# Altium PCB BOARD2.PcbDoc
Units mm, origin at the board's own origin, x right, y up, seen from the top; angles counter-clockwise.
Board outline 50 x 50 mm, 2 copper layers (Top Layer, Bottom Layer); 45 components, 74 nets, 187 pads, 38 vias.
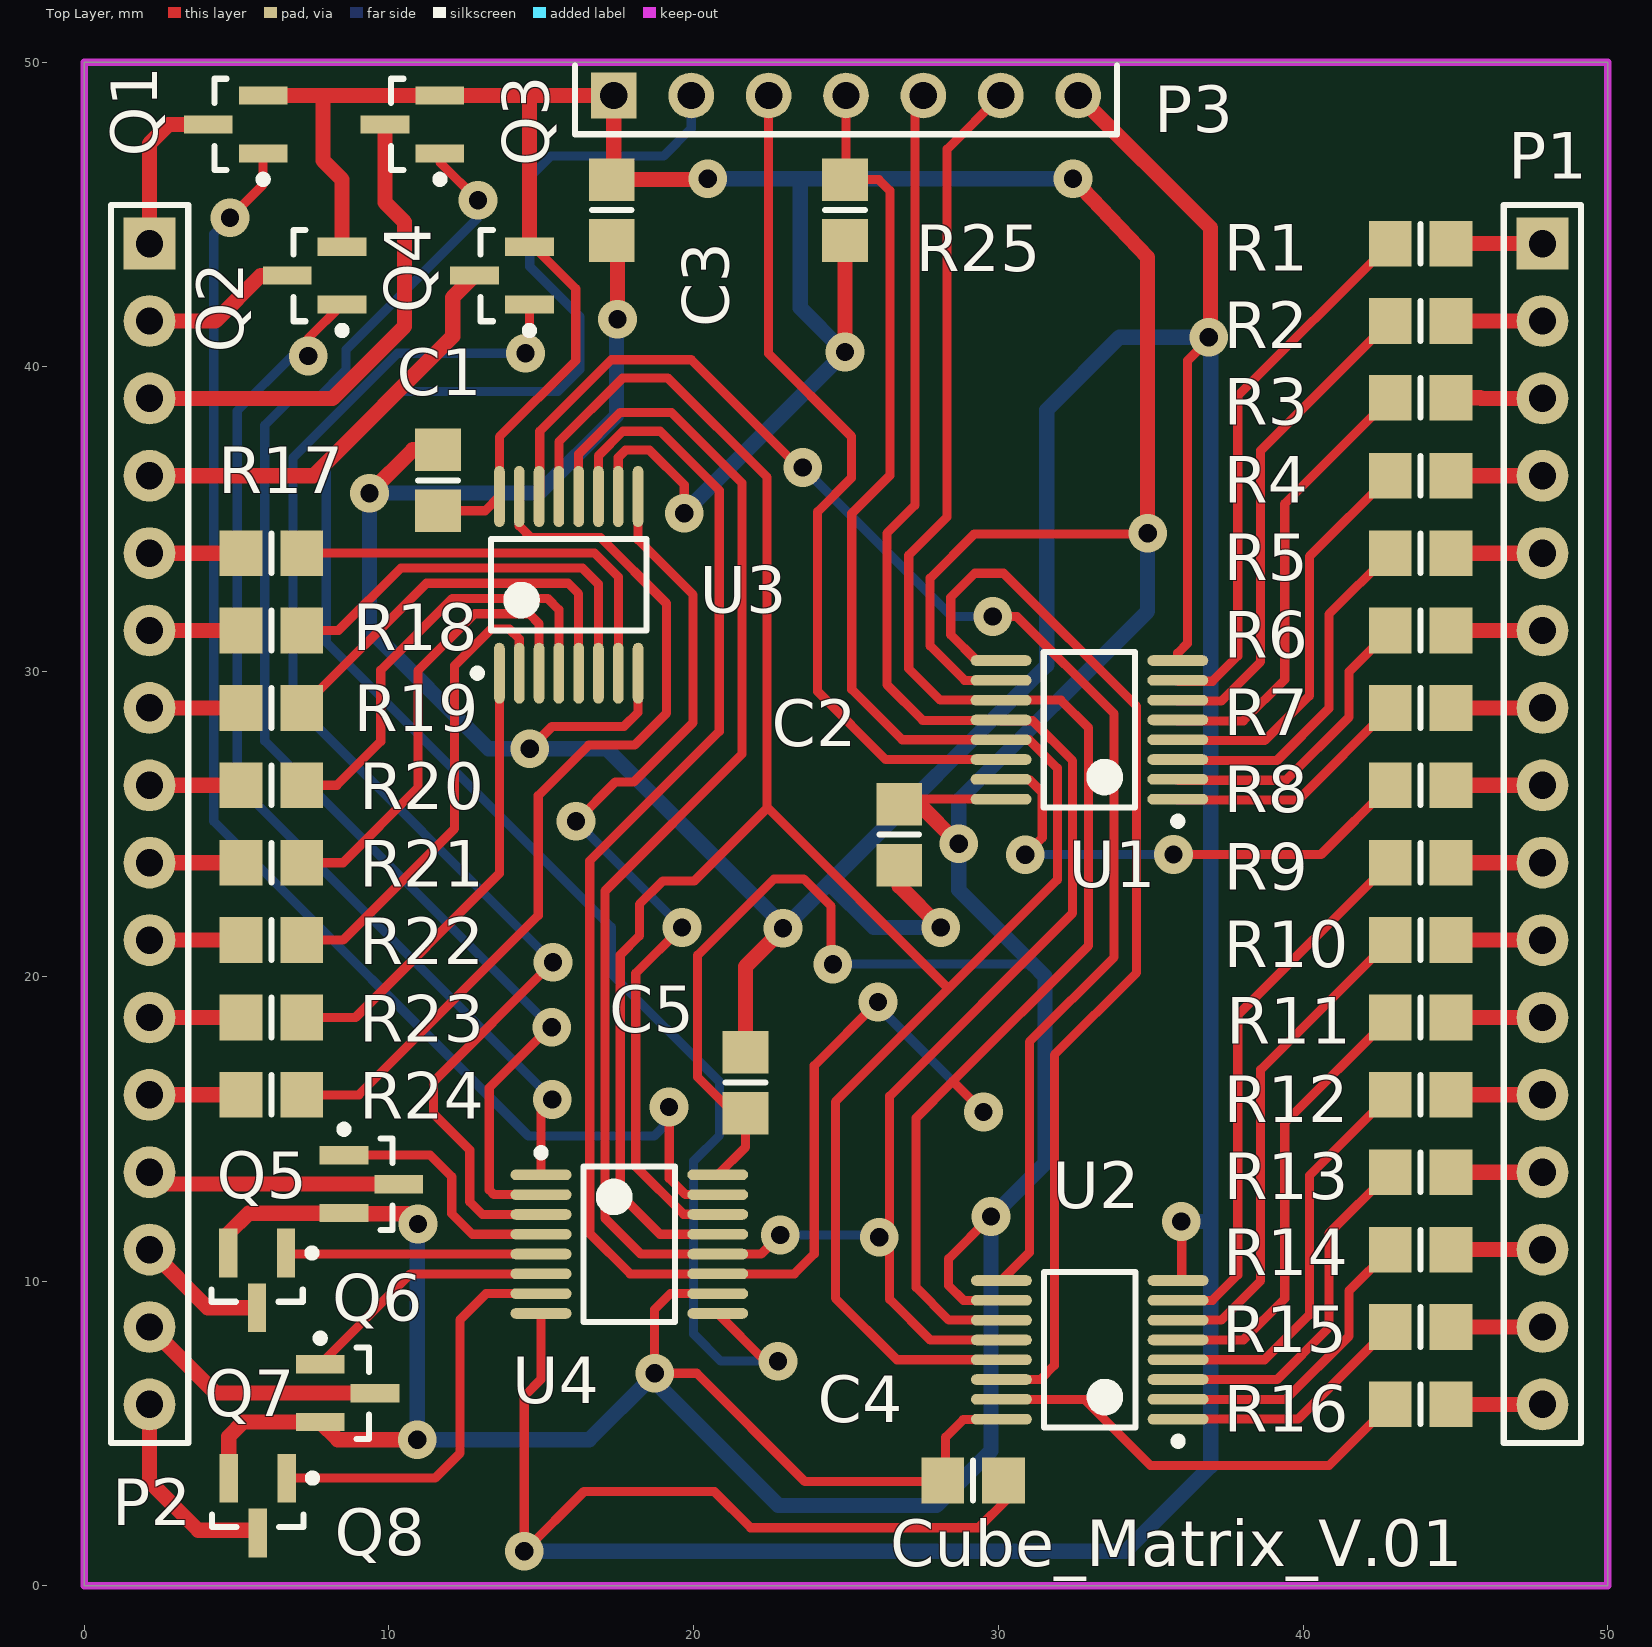
[diagram p0: Top Layer view]
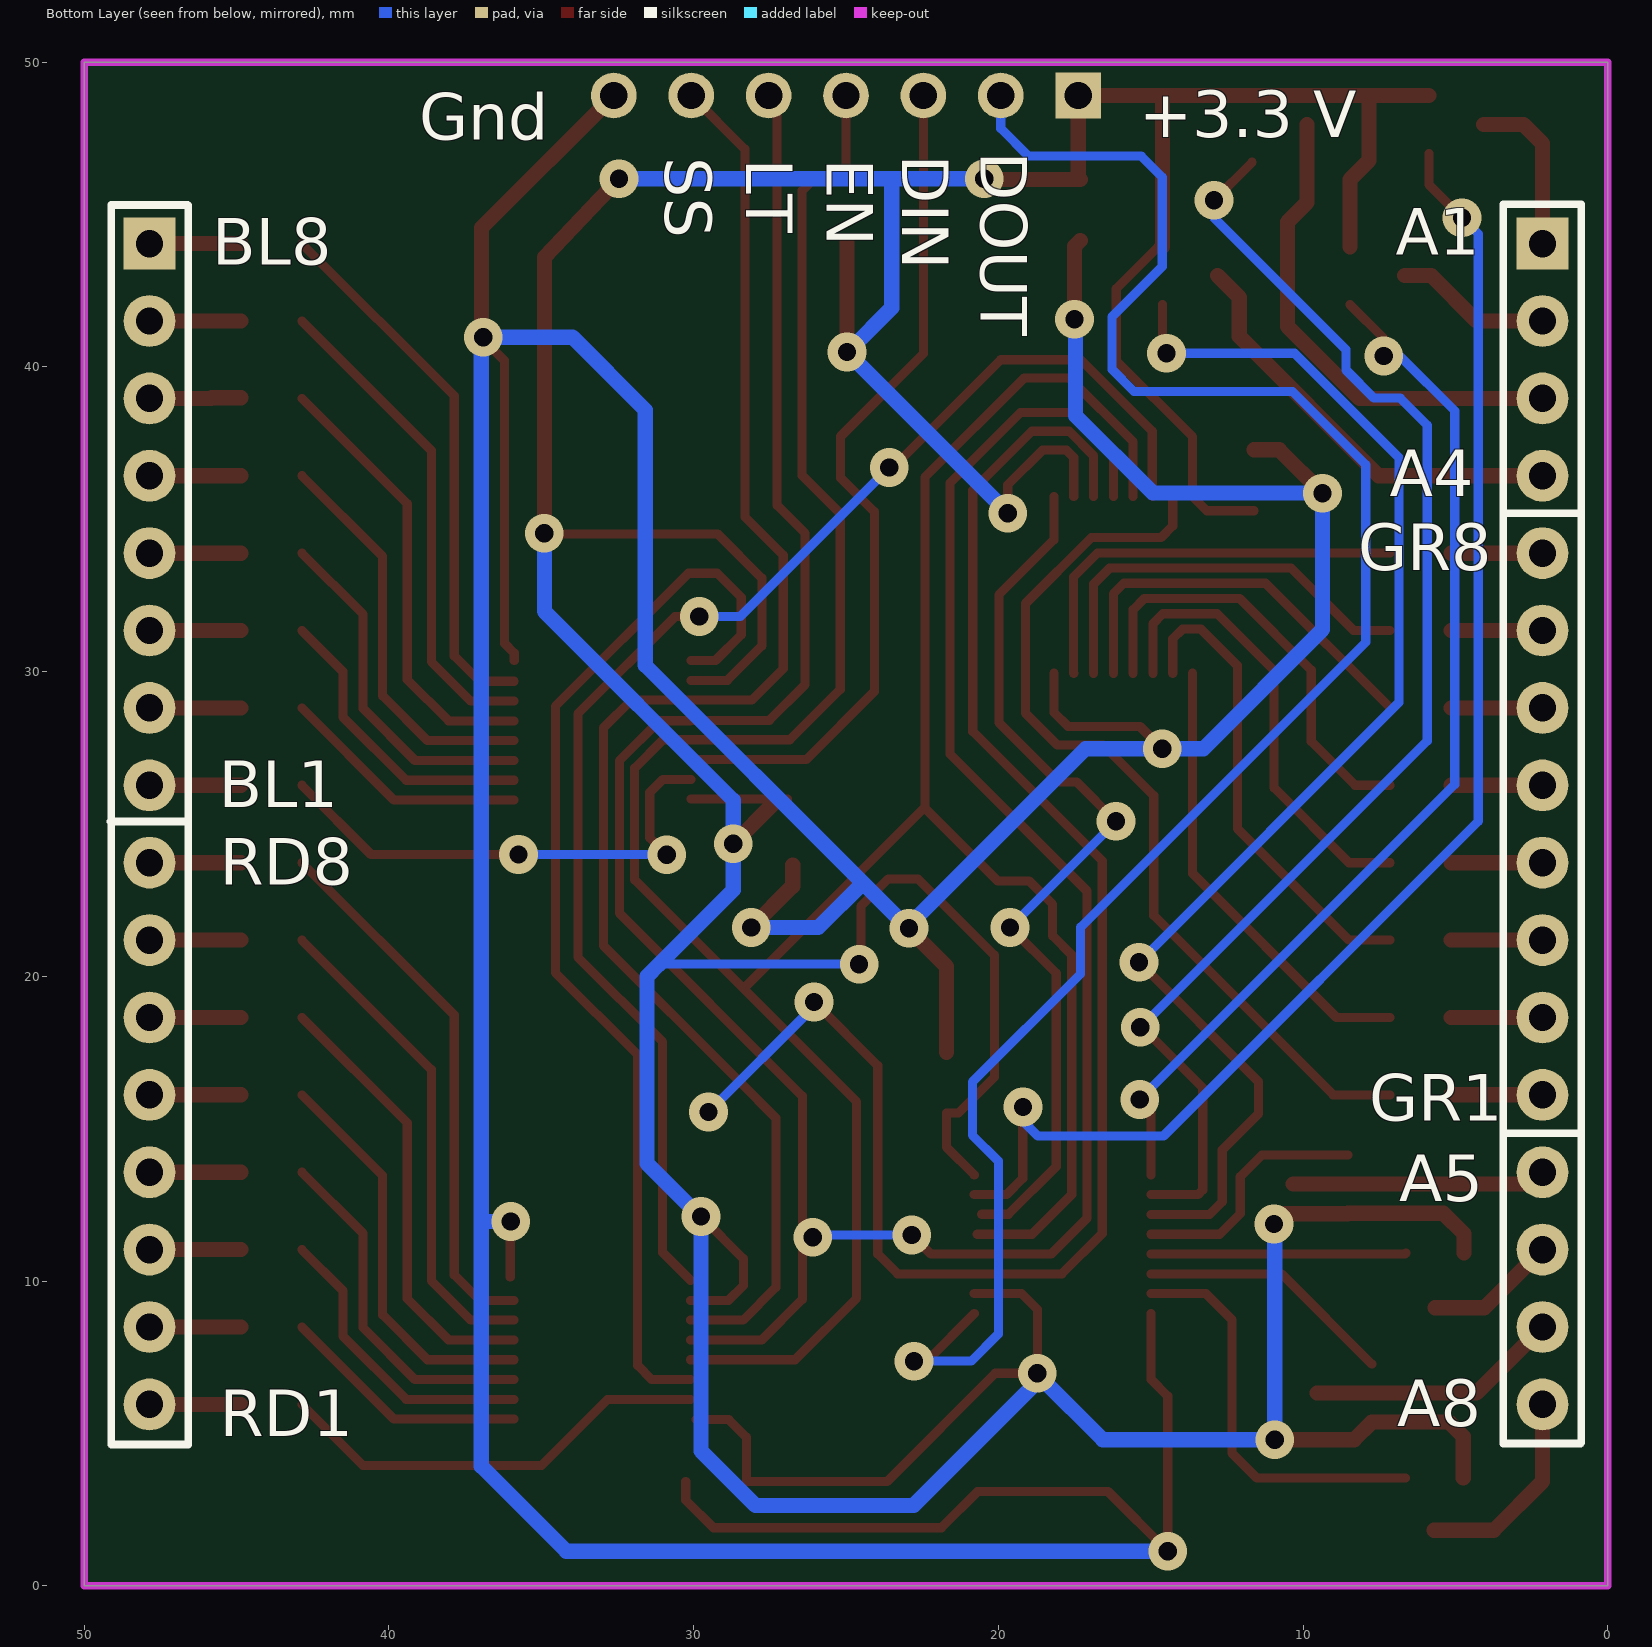
[diagram p1: Bottom Layer view, seen from below]

## Layer stack, top to bottom
Top Solder: solder mask 0.0102, Solder Resist, Dk 3.5
Top Layer: signal copper 0.0356
Dielectric 1: dielectric 0.32, FR-4, Dk 4.8
Bottom Layer: signal copper 0.0356
Bottom Solder: solder mask 0.0102, Solder Resist, Dk 3.5

## Board outline
0,0 50,0 50,50 0,50

## Design rules (kind name [scope] priority, off if disabled: settings)
Clearance [All] p1: gap=0.2
HoleSize [All] p1 off: absolutevalues=TRUE maxlimit=2.54 minlimit=0.025 maxpercent=80.000 minpercent=20.000
HoleToHoleClearance [All] p1 off: gap=0.254 allowstackedmicrovias=TRUE
LayerPairs [All] p1 off: enforce=TRUE
MinimumSolderMaskSliver [All] p1 off: minsoldermaskwidth=0.254
NetAntennae [All] p1 off: netantennaetolerance=0
PolygonConnect [All] p1: connectstyle=Relief reliefconductorwidth=0.254 reliefentries=4 polygonreliefangle="90 Angle" airgapwidth=0.254
RoutingVias [All] p1: holewidth=0.6 width=1.27 viastyle="Through Hole" minholewidth=0.6 minwidth=1.27 maxholewidth=0.6 maxwidth=1.27
SilkToBoardRegionClearance [All] p1 off:
SilkToSilkClearance [All] p1 off: silktosilkclearance=0.254
SilkToSolderMaskClearance [IsPad] p1 off: minsilkscreentomaskgap=0.254 clearancetoexposedcopper=TRUE
SolderMaskExpansion [All] p1: expansion=0.102
Width [All] p1: maxlimit=0.5 minlimit=0.3 preferedwidth=0.3
21 further rules are at their usual default settings.

## Components (designator, comment, footprint, x,y, rotation, side; value= is the part's Value field where it differs from the comment)
C1 "Cap" 6-0805_M 11.61,36.28 r270 top locked
C2 "Cap" 6-0805_M 26.75,24.65 r90 top locked
C3 "Cap" 6-0805_M 17.31,45.15 r90 top
C4 "Cap" 6-0805_M 29.17,3.45 r180 top locked
C5 "Cap" 6-0805_M 21.7,16.51 r270 top locked
P1 "Header 16" HDR1X16 47.86,44.05 r270 top locked
P2 "Header 16" HDR1X16 2.14,44.05 r270 top locked
P3 "Header 7" HDR1X7 17.38,48.91 r0 top locked
Q1 "IRLML6402" SOT95P237X112-3N 4.97,47.96 r180 top locked
Q2 "IRLML6402" SOT95P237X112-3N 7.56,43 r180 top locked
Q3 "IRLML6402" SOT95P237X112-3N 10.77,47.96 r180 top locked
Q4 "IRLML6402" SOT95P237X112-3N 13.71,43 r180 top locked
Q5 "IRLML6402" SOT95P237X112-3N 9.42,13.18 r0 top locked
Q6 "IRLML6402" SOT95P237X112-3N 5.67,10.02 r270 top locked
Q7 "IRLML6402" SOT95P237X112-3N 8.64,6.32 r0 top locked
Q8 "IRLML6402" SOT95P237X112-3N 5.69,2.63 r270 top locked
R1 "Res2" 6-0805_M 43.86,44.05 r0 top locked
R2 "Res2" 6-0805_M 43.86,41.51 r0 top locked
R3 "Res2" 6-0805_M 43.86,38.99 r0 top locked
R4 "Res2" 6-0805_M 43.86,36.43 r0 top locked
R5 "Res2" 6-0805_M 43.86,33.89 r0 top locked
R6 "Res2" 6-0805_M 43.86,31.35 r0 top locked
R7 "Res2" 6-0805_M 43.86,28.81 r0 top locked
R8 "Res2" 6-0805_M 43.86,26.27 r0 top locked
R9 "Res2" 6-0805_M 43.86,23.73 r0 top locked
R10 "Res2" 6-0805_M 43.86,21.19 r0 top locked
R11 "Res2" 6-0805_M 43.86,18.65 r0 top locked
R12 "Res2" 6-0805_M 43.86,16.11 r0 top locked
R13 "Res2" 6-0805_M 43.86,13.57 r0 top locked
R14 "Res2" 6-0805_M 43.86,11.03 r0 top locked
R15 "Res2" 6-0805_M 43.86,8.49 r0 top locked
R16 "Res2" 6-0805_M 43.86,5.95 r0 top locked
R17 "Res2" 6-0805_M 6.14,33.89 r180 top locked
R18 "Res2" 6-0805_M 6.14,31.35 r180 top locked
R19 "Res2" 6-0805_M 6.14,28.81 r180 top locked
R20 "Res2" 6-0805_M 6.14,26.27 r180 top locked
R21 "Res2" 6-0805_M 6.14,23.73 r180 top locked
R22 "Res2" 6-0805_M 6.14,21.19 r180 top locked
R23 "Res2" 6-0805_M 6.14,18.65 r180 top locked
R24 "Res2" 6-0805_M 6.14,16.11 r180 top locked
R25 "Res2" 6-0805_M 24.97,45.15 r270 top locked
U1 "74HC595" TSOP65P640X110-16M 32.99,28.09 r180 top locked
U2 "74HC595" TSOP65P640X110-16M 33,7.74 r180 top locked
U3 "74HC595" TSOP65P640X110-16M 15.9,32.85 r90 top locked
U4 "74HC595" TSOP65P640X110-16M 17.89,11.21 r0 top locked

## Footprints (in the part's own frame and the unit in brackets; to place one, negate y for a bottom-side part, rotate by r counter-clockwise, add the part's x,y. Pads: shape width x height; smd on the part's side, far side on the other; paste and mask are expansions set on the pad)
6-0805_M [mm] "Chip Resistor, Body 2.0x1.2mm, IPC Low Density"
  rect 1.4x1.5 smd: 1(-1,0) 2(1,0)
  silkscreen extent 0,-0.65 0,0.65, body extent -1.07,-0.7 1.07,0.7, height 0.7
HDR1X7 [mm] "Connector; Header; 7 Position"
  rect 1.5x1.5 hole 0.9: 1(0,0)
  round 1.5 hole 0.9: 2(2.54,0) 3(5.08,0) 4(7.62,0) 5(10.16,0) 6(12.7,0) 7(15.24,0)
  silkscreen extent -1.27,-1.27 16.51,0.98
HDR1X16 [mm] "Connector; Header; 16 Position"
  rect 1.7x1.7 hole 0.9: 1(0,0)
  round 1.7 hole 0.9: 2(2.54,0) 3(5.08,0) 4(7.62,0) 5(10.16,0) 6(12.7,0) 7(15.24,0) 8(17.78,0) 9(20.32,0) 10(22.86,0) 11(25.4,0) 12(27.94,0) 13(30.48,0) 14(33.02,0) 15(35.56,0) 16(38.1,0)
  silkscreen extent -1.27,-1.27 39.37,1.27
SOT95P237X112-3N [mm] "SOT23, 3-Leads, Body 2.92x2.37mm, Pitch 0.95mm, IPC Medium Density"
  rect 1.6x0.6 smd: 1(-0.9,0.95) 2(0.9,0) 3(-0.9,-0.95)
  silkscreen extent -1.03,-1.5 0.7,1.92, body extent -0.7,-1.52 0.7,1.52, height 1.12
TSOP65P640X110-16M [mm] "TSOP, 16-Leads, Body 5.00x4.40mm, Pitch 0.65mm, IPC Low Density"
  oval 2x0.35 smd: 1(-2.9,2.275) 2(-2.9,1.625) 3(-2.9,0.975) 4(-2.9,0.325) 5(-2.9,-0.325) 6(-2.9,-0.975) 7(-2.9,-1.625) 8(-2.9,-2.275) 9(2.9,-2.275) 10(2.9,-1.625) 11(2.9,-0.975) 12(2.9,-0.325) 13(2.9,0.325) 14(2.9,0.975) 15(2.9,1.625) 16(2.9,2.275)
  silkscreen extent -3.03,-2.55 1.5,3.12, body extent -2.25,-2.55 2.25,2.55, height 1.1

## Part data
C1 C2 C3 C4 C5: "Capacitor"
P1 P2: "Header, 16-Pin"
P3: "Header, 7-Pin"
R1 R2 R3 R4 R5 R6 R7 R8 R9 R10 R11 R12 R13 R14 R15 R16 R17 R18 R19 R20 R21 R22 R23 R24 R25: "Resistor"
U1 U2 U3 U4: "NXP"

## Via types
v1: diameter 1.27, hole 0.6, Top Layer to Bottom Layer, 38 vias

## Nets (pads, with @x,y where several pads share a name; then routed paths per layer and width w, separated by ;. In a path a pad name is that pad's centre, name@x,y a point inside that pad or via, vN(x,y) a via of type N, cw(c..) or ccw(c..) an arc to the next point about the centre after c; other vN are vias at no path point)
A1: P2.1 Q1.2 | length 5.5
  Top Layer w0.5: P2.1 2.14,47.34 2.76,47.96 Q1.2
A2: P2.2 Q2.2 | length 5.1
  Top Layer w0.5: P2.2 4.3,41.51 5.79,43 Q2.2
A3: P2.3 Q3.2 | length 16.2
  Top Layer w0.5: P2.3 8.15,38.97 10.51,41.33 10.51,44.76 9.87,45.4 Q3.2
A4: P2.4 Q4.2 | length 14.1
  Top Layer w0.5: P2.4 7.52,36.43 12.09,41 12.09,42.28 Q4.2
A5: P2.13 Q5.2 | length 8.3
  Top Layer w0.5: P2.13 2.53,13.18 Q5.2
A6: P2.14 Q6.2 | length 4.3
  Top Layer w0.5: P2.14 4.05,9.12 Q6.2
A7: P2.15 Q7.2 | length 8.3
  Top Layer w0.5: P2.15 4.31,6.32 Q7.2
A8: P2.16 Q8.2 | length 6.8
  Top Layer w0.5: P2.16 2.14,3.42 3.74,1.82 Q8.2@5.7,1.82
BL1: P1.8 R8.2 | length 3
  Top Layer w0.5: R8.2 P1.8
BL2: P1.7 R7.2 | length 3
  Top Layer w0.5: R7.2 P1.7
BL3: P1.6 R6.2 | length 3
  Top Layer w0.5: R6.2 P1.6
BL4: P1.5 R5.2 | length 3
  Top Layer w0.5: R5.2 P1.5
BL5: P1.4 R4.2 | length 3
  Top Layer w0.5: R4.2 P1.4
BL6: P1.3 R3.2 | length 3
  Top Layer w0.5: R3.2 45.82,38.99 45.84,38.97 P1.3
BL7: P1.2 R2.2 | length 3
  Top Layer w0.5: R2.2 P1.2
BL8: P1.1 R1.2 | length 3
  Top Layer w0.5: R1.2 P1.1
DIN: P3.3 U1.14 | length 28.1
  Top Layer w0.3: P3.3 22.46,40.44 25.18,37.72 25.18,36.36 24.07,35.25 24.07,29.35 26.305,27.115 U1.14
DOUT: P3.2 U4.9 | length 63.7
  Top Layer w0.3: U4.9 22.355,7.37 v1(22.77,7.37)
  Bottom Layer w0.3: P3.2 19.92,47.83 19.01,46.92 15.31,46.92 14.62,46.23 14.62,43.3 16.27,41.65 16.27,39.92 15.55,39.2 10.35,39.2 7.94,36.79 7.94,30.97 17.3,21.61 17.3,20.08 20.85,16.53 20.85,14.79 20,13.94 20,8.26 20.89,7.37 v1(22.77,7.37)
EN: P3.4 R25.1 U1.13 U2.13 U3.13 U4.13 | length 104.8
  Top Layer w0.3: U3.13 15.575,37.545 17.67,39.64 19.15,39.64 22.41,36.38 22.41,25.5 22.46,25.5 28.365,19.595 ; U4.13@20.69,11.535 18.895,11.535 17.59,12.84 17.59,20.7 18.22,21.33 18.22,22.36 18.99,23.13 20.02,23.13 22.4,25.51 ; R25.1 26.08,46.15 26.44,45.79 26.44,36.44 25.19,35.19 25.19,29.42 26.845,27.765 U1.13 31.007,27.765 31.94,26.832 31.94,23.17 24.65,15.88 24.65,9.44 26.675,7.415 U2.13 ; R25.1@25,46.18 P3.4
G1: Q8.1 U4.7 | length 13.4
  Top Layer w0.3: Q8.1 11.51,3.53 12.33,4.35 12.33,8.73 13.185,9.585 U4.7
G2: Q7.1 U4.6 | length 8.5
  Top Layer w0.3: Q7.1 10.705,10.235 U4.6
G3: Q6.1 U4.5 | length 8.4
  Top Layer w0.3: Q6.1 6.655,10.885 U4.5
G4: Q5.1 U4.4 | length 8.3
  Top Layer w0.3: Q5.1 11.35,14.13 12.06,13.42 12.06,12.21 12.735,11.535 U4.4
G5: Q4.1 U4.3 | length 43.3
  Top Layer w0.3: v1@14.54,40.39 14.61,40.46 Q4.1 ; U4.3 13.065,12.185 12.65,12.6 12.65,14.3 11.46,15.49 11.46,16.54 v1(15.38,20.46)
  Bottom Layer w0.3: v1@14.49,40.45 10.28,40.45 8.59,38.76 6.85,37.02 6.85,28.99 v1(15.38,20.46)
  other v1: 14.48,40.45
G6: Q3.1 U4.2 | length 44.3
  Top Layer w0.3: Q3.1@11.67,46.72 v1(12.92,45.47) ; U4.2 13.445,12.835 13.29,12.99 13.29,16.34 v1@15.31,18.36
  Bottom Layer w0.3: v1(12.92,45.47) 12.92,44.9 8.59,40.57 8.59,39.9 7.67,38.98 6.81,38.98 5.92,38.09 5.92,27.73 15.205,18.445 v1@15.205,18.195
  other v1: 15.34,18.33
G7: Q2.1 U4.1 | length 34.7
  Top Layer w0.3: v1(7.35,40.36) 7.35,40.94 Q2.1 ; U4.1 14.99,15.59 v1(15.36,15.96)
  Bottom Layer w0.3: v1(7.35,40.36) 6.82,40.36 5.02,38.56 5.02,26.3 v1(15.36,15.96)
G8: Q1.1 U4.15 | length 46.3
  Top Layer w0.3: v1(4.78,44.9) 5.87,45.99 Q1.1 ; v1@19.2,15.4 19.2,13.367 19.732,12.835 U4.15
  Bottom Layer w0.3: v1(4.78,44.9) 4.25,44.37 4.25,25.09 14.58,14.76 18.7,14.76 19.19,15.25 v1(19.19,15.71)
GND: C1.1 C2.1 C3.1 C4.1 C5.1 P3.7 U1.8 U2.8 U3.8 U4.8 | length 194
  Top Layer w0.3: v1(14.62,27.47) 15.35,28.2 17.71,28.2 18.175,28.665 U3.8 ; U4.8 14.99,6.77 14.44,6.22 v1(14.44,1.13) 16.4,3.09 20.68,3.09 21.87,1.9 29.35,1.9 30.26,2.81 C4.1@30.26,3.42 ; U1.8 35.89,30.61 36.21,30.93 36.21,40.21 v1@36.96,40.96 ; U2.8@36.02,10.135 v1@36.02,11.95
  Top Layer w0.5: v1(9.36,35.86) 10.78,37.28 C1.1 ; C3.1 17.5,43.96 v1(17.5,41.57) ; C5.1 21.7,20.32 v1@22.935,21.555 ; C2.1 26.75,22.96 v1(28.11,21.6) ; P3.7 36.96,44.57 v1@36.96,40.96
  Bottom Layer w0.5: v1(14.44,1.13) 34.18,1.13 36.97,3.92 36.97,11.95 ; v1(17.5,41.57) 17.47,41.54 17.47,38.4 14.93,35.86 v1(9.36,35.86) 9.36,31.38 13.27,27.47 v1(14.62,27.47) 17.14,27.47 v1@22.89,21.72 ; v1@22.935,21.555 24.445,23.065 ; v1(28.11,21.6) 25.91,21.6 24.445,23.065 ; v1@36.02,11.95 36.97,11.95 ; 24.445,23.065 31.59,30.21 31.59,38.59 33.98,40.98 v1(36.91,40.98) 36.97,40.92 36.97,11.95
  other v1: 36,11.95 22.93,21.58
GR1: P2.12 R24.2 | length 3
  Top Layer w0.5: P2.12 R24.2
GR2: P2.11 R23.2 | length 3
  Top Layer w0.5: P2.11 R23.2
GR3: P2.10 R22.2 | length 3
  Top Layer w0.5: P2.10 R22.2
GR4: P2.9 R21.2 | length 3
  Top Layer w0.5: P2.9 R21.2
GR5: P2.8 R20.2 | length 3
  Top Layer w0.5: P2.8 4.19,26.27 R20.2
GR6: P2.7 R19.2 | length 3
  Top Layer w0.5: P2.7 4.19,28.81 R19.2
GR7: P2.6 R18.2 | length 3
  Top Layer w0.5: P2.6 4.19,31.35 R18.2
GR8: P2.5 R17.2 | length 3
  Top Layer w0.5: P2.5 4.19,33.89 R17.2
LT: P3.5 U1.12 U2.12 U3.12 U4.12 | length 96.3
  Top Layer w0.3: U3.12 16.225,37.145 17.59,38.51 19.27,38.51 21.59,36.19 21.59,27.3 17.09,22.8 17.09,12.06 18.265,10.885 U4.12 22.215,10.885 v1(22.84,11.51) ; v1(26.09,11.44) 26.09,11.27 26.05,11.23 v1@26.43,11.23 ; P3.5 27.26,48.63 27.26,35.46 26.34,34.54 26.34,29.58 27.52,28.4 30.075,28.4 U1.12 30.115,28.39 31.12,28.39 32.44,27.07 32.44,22.08 26.43,16.07 v1@26.43,11.23 ; U2.12 27.765,8.065 26.43,9.4 v1@26.43,11.23
  Bottom Layer w0.3: v1(22.84,11.51) 25.77,11.51 26.05,11.23 26.09,11.27 v1(26.09,11.44)
NetR1_1: R1.1 U1.7 | length 17.9
  Top Layer w0.3: U1.7@35.9,29.685 37.025,29.685 37.86,30.52 37.86,39.05 R1.1
NetR2_1: R2.1 U1.6 | length 16.2
  Top Layer w0.3: U1.6@35.9,29.035 37.315,29.035 38.61,30.33 38.61,37.26 R2.1
NetR3_1: R3.1 U1.5 | length 14.7
  Top Layer w0.3: U1.5@35.9,28.385 38.045,28.385 39.4,29.74 39.4,35.51 R3.1@42.86,38.97
NetR4_1: R4.1 U1.4 | length 13.2
  Top Layer w0.3: U1.4@35.9,27.735 38.735,27.735 40.21,29.21 40.21,33.78 R4.1
NetR5_1: R5.1 U1.3 | length 11.6
  Top Layer w0.3: U1.3@35.9,27.085 39.145,27.085 40.85,28.79 40.85,31.88 R5.1
NetR6_1: R6.1 U1.2 | length 9.9
  Top Layer w0.3: U1.2@35.9,26.435 39.435,26.435 41.51,28.51 41.51,30 R6.1
NetR7_1: R7.1 U1.1 | length 8.2
  Top Layer w0.3: U1.1@35.9,25.785 39.835,25.785 R7.1
NetR8_1: R8.1 U1.15 | length 16.7
  Top Layer w0.3: U1.15 31.007,26.465 31.44,26.032 31.44,24.55 v1(30.88,23.99) ; v1(35.75,24) 40.59,24 R8.1
  Bottom Layer w0.3: v1@30.88,24 v1(35.75,24)
NetR9_1: R9.1 U2.7 | length 17.9
  Top Layer w0.3: U2.7 37.025,9.365 37.86,10.2 37.86,18.73 R9.1
NetR10_1: R10.1 U2.6 | length 16.2
  Top Layer w0.3: U2.6 37.315,8.715 38.61,10.01 38.61,16.94 R10.1
NetR11_1: R11.1 U2.5 | length 14.7
  Top Layer w0.3: U2.5 38.045,8.065 39.4,9.42 39.4,15.19 R11.1
NetR12_1: R12.1 U2.4 | length 13.2
  Top Layer w0.3: U2.4 38.735,7.415 40.21,8.89 40.21,13.46 R12.1
NetR13_1: R13.1 U2.3 | length 11.6
  Top Layer w0.3: U2.3 39.145,6.765 40.85,8.47 40.85,11.56 R13.1
NetR14_1: R14.1 U2.2 | length 9.9
  Top Layer w0.3: U2.2 39.435,6.115 41.51,8.19 41.51,9.68 R14.1
NetR15_1: R15.1 U2.1 | length 8.2
  Top Layer w0.3: U2.1 39.835,5.465 R15.1
NetR16_1: R16.1 U2.15 | length 14.5
  Top Layer w0.3: U2.15 32.825,6.115 35,3.94 40.85,3.94 R16.1
NetR17_1: R17.1 U3.7 | length 13.9
  Top Layer w0.3: R17.1@7.14,33.9 16.74,33.9 17.53,33.11 17.53,29.955 U3.7
NetR18_1: R18.1 U3.6 | length 13.7
  Top Layer w0.3: R18.1 8.34,31.35 10.39,33.4 16.35,33.4 16.875,32.875 U3.6
NetR19_1: R19.1 U3.5 | length 13.5
  Top Layer w0.3: R19.1 11.23,32.9 15.88,32.9 16.225,32.555 U3.5
NetR20_1: R20.1 U3.4 | length 14.6
  Top Layer w0.3: R20.1@7.15,26.26 R20.1 8.29,26.27 9.73,27.71 9.73,30.05 12.08,32.4 15.21,32.4 15.575,32.035 U3.4
NetR21_1: R21.1 U3.3 | length 15.2
  Top Layer w0.3: R21.1 8.49,23.73 10.95,26.19 10.95,30.03 12.82,31.9 14.6,31.9 14.925,31.575 U3.3
NetR22_1: R22.1 U3.2 | length 15.8
  Top Layer w0.3: R22.1 8.49,21.19 12.15,24.85 12.15,30.2 13.35,31.4 13.95,31.4 14.275,31.075 U3.2
NetR23_1: R23.1 U3.1 | length 15
  Top Layer w0.3: R23.1 8.9,18.65 13.625,23.375 U3.1
NetR24_1: R24.1 U3.15 | length 29.9
  Top Layer w0.3: R24.1 9.01,16.11 14.9,22 14.9,25.93 16.558,27.587 18.058,27.587 19.11,28.64 19.11,32.237 16.947,34.4 14.66,34.4 14.275,34.785 U3.15
NetU1_9: U1.9 U2.14 | length 36.1
  Top Layer w0.3: U1.9 29.285,30.365 28.44,31.21 28.44,32.44 29.23,33.23 30.17,33.23 34.54,28.86 34.54,20.12 31.84,17.42 31.84,7.23 31.375,6.765 U2.14
NetU2_9: U2.9 U3.14 | length 47.1
  Top Layer w0.3: U3.14 14.95,35.775 14.95,37.89 17.3,40.24 19.92,40.24 23.58,36.58 v1(23.58,36.7) ; v1(29.82,31.81) 30.61,31.81 33.8,28.62 33.8,20.63 31.02,17.85 31.02,10.935 U2.9
  Bottom Layer w0.3: v1(23.58,36.7) 28.47,31.81 v1(29.82,31.81)
NetU3_9: U3.9 U4.14 | length 29.8
  Top Layer w0.3: v1(16.14,25.09) 17.43,26.38 18.03,26.38 19.98,28.33 19.98,32.52 18.175,34.325 U3.9 ; v1@19.6,21.6 18.1,20.1 18.1,13.76 19.67,12.19 U4.14@20.545,12.19
  Bottom Layer w0.3: v1(16.14,25.09) 16.14,25.08 v1(19.62,21.6)
RD1: P1.16 R16.2 | length 3
  Top Layer w0.5: R16.2 P1.16
RD2: P1.15 R15.2 | length 3
  Top Layer w0.5: R15.2 P1.15
RD3: P1.14 R14.2 | length 3
  Top Layer w0.5: R14.2 P1.14
RD4: P1.13 R13.2 | length 3
  Top Layer w0.5: R13.2 P1.13
RD5: P1.12 R12.2 | length 3
  Top Layer w0.5: R12.2 P1.12
RD6: P1.11 R11.2 | length 3
  Top Layer w0.5: R11.2 P1.11
RD7: P1.10 R10.2 | length 3
  Top Layer w0.5: R10.2 P1.10
RD8: P1.9 R9.2 | length 3
  Top Layer w0.5: R9.2 P1.9
SS: P3.6 U1.11 U2.11 U3.11 U4.11 | length 107.1
  Top Layer w0.3: U3.11 16.875,37.088 17.677,37.89 18.9,37.89 20.84,35.95 20.84,28.04 16.59,23.79 16.59,11.56 17.915,10.235 U4.11 23.305,10.235 23.96,10.89 23.96,17.07 v1(26.05,19.16) ; v1(29.51,15.55) 28.505,16.555 ; P3.6 28.32,47.15 28.32,35.08 27.06,33.82 27.06,30.1 28.095,29.065 U1.11 32.055,29.065 32.96,28.16 32.96,21.01 28.505,16.555 ; U2.11 28.375,8.715 27.3,9.79 27.3,15.35 28.505,16.555
  Bottom Layer w0.3: v1(26.05,19.16) 26.05,19.01 v1(29.51,15.55)
VCC: C1.2 C2.2 C3.2 C4.2 C5.2 P3.1 Q1.3 Q2.3 Q3.3 Q4.3 Q5.3 Q6.3 Q7.3 Q8.3 R25.2 U1.10 U1.16 U2.10 U2.16 U3.10 U3.16 U4.10 U4.16 | length 229.7
  Top Layer w0.3: C1.2 13.155,35.28 U3.16 13.625,37.705 16.13,40.21 16.13,42.57 14.75,43.95 Q4.3 ; U3.10 17.525,37.031 17.764,37.27 18.55,37.27 19.69,36.13 v1(19.69,35.2) ; 18.71,9.05 18.71,9.06 19.235,9.585 U4.10 ; v1(18.72,6.97) 20.1,6.97 23.65,3.42 28.26,3.42 28.27,3.43 28.27,4.87 28.85,5.45 U2.16@29.925,5.45 ; v1@18.72,7.09 18.72,9.04 ; U4.16 21.7,14.395 C5.2 21.31,15.51 20.13,16.69 20.13,20.69 22.64,23.2 23.61,23.2 24.51,22.3 24.51,20.42 24.585,20.345 24.64,20.4 v1(24.57,20.4) ; C2.2@26.915,25.815 U1.16 ; v1(29.76,12.12) 28.37,10.73 28.37,9.85 28.855,9.365 U2.10 ; U1.10 28.895,29.715 27.76,30.85 27.76,33.07 29.21,34.52 v1@34.88,34.52
  Top Layer w0.5: Q6.3 4.72,11.55 5.39,12.22 Q5.3@8.52,12.22 ; Q8.3 4.74,4.9 5.21,5.37 Q7.3 8.32,4.79 v1(10.93,4.79) ; Q1.3 7.83,48.91 ; Q2.3 8.46,46.15 7.83,46.78 7.83,48.91 ; Q5.3 8.54,12.21 10.61,12.21 v1(10.95,11.87) ; Q4.3 14.61,48.84 ; C3.2 20.36,46.15 v1(20.46,46.18) ; C3.2@17.38,46.23 P3.1 7.83,48.91 ; v1(24.97,40.49) R25.2 ; C2.2@27.4,25.65 v1(28.7,24.35) ; v1(32.45,46.18) 34.9,43.6 v1(34.9,34.54)
  Bottom Layer w0.3: v1(24.57,20.4) 31.13,20.4
  Bottom Layer w0.5: v1(10.95,11.87) 10.93,11.85 v1(10.93,4.79) 16.57,4.79 18.595,6.815 22.78,2.63 27.97,2.63 29.76,4.42 v1(29.76,12.12) ; v1@19.685,35.205 v1(24.97,40.49) ; v1(19.69,35.2) 19.71,35.22 v1@19.71,35.24 ; v1(20.46,46.18) 23.5,46.18 ; v1@24.86,40.58 23.5,41.94 23.5,46.18 ; v1@29.775,12.105 31.53,13.86 31.53,20 31.13,20.4 28.7,22.83 v1(28.7,24.35) 28.7,25.78 34.9,31.98 v1(34.9,34.54) ; v1(32.45,46.18) 23.5,46.18

## Keep-outs
Keep-Out Layer:
  the board outline again, w0.254

## Silkscreen, mask and mechanical layers (free items; w line width, h text height)
Top Overlay:
  text "Cube_Matrix_V.01" at 26.45,0.63 h1.52
Bottom Overlay:
  lines w0.254: 46.59,45.3 46.59,25.07 ; 46.61,45.32 49.12,45.32 ; 49.1,45.3 49.12,45.32 ; 0.87,14.85 3.43,14.85 ; 0.87,14.85 0.87,35.2 ; 0.87,14.85 0.87,4.69 0.89,4.67 3.43,4.67 3.43,14.85 ; 0.87,35.2 3.38,35.2 0.87,35.2 ; 0.87,35.2 0.87,45.34 3.43,45.34 3.43,35.15 3.43,14.85 ; 46.59,25.07 46.6,25.08 ; 46.59,25.07 46.6,25.08 ; 46.59,25.07 46.59,4.63 49.11,4.63 49.12,4.64 49.12,25.1 49.12,45.32 ; 46.6,25.08 49.14,25.08 46.6,25.08
  text "+3.3 V" at 15.38,47.54 h1.52
  text "Gnd" at 39,47.46 h1.52
  text "DOUT" at 20.58,47.07 h1.52 r90
  text "DIN" at 23.16,46.96 h1.52 r90
  text "SS" at 30.93,46.89 h1.52 r90
  text "EN" at 25.64,46.83 h1.52 r90
  text "LT" at 28.27,46.83 h1.52 r90
  text "A1" at 6.96,43.69 h1.52
  text "BL8" at 45.8,43.35 h1.52
  text "A4" at 7.16,35.76 h1.52
  text "GR8" at 8.19,33.33 h1.52
  text "BL1" at 45.59,25.55 h1.52
  text "RD8" at 45.56,23.01 h1.52
  text "GR1" at 7.83,15.26 h1.52
  text "A5" at 6.84,12.61 h1.52
  text "A8" at 6.91,5.23 h1.52
  text "RD1" at 45.56,4.91 h1.52